# Altium PCB Cherima_DC_Multi2.PcbDoc
Units mil, origin at the board's own origin, x right, y up, seen from the top; angles counter-clockwise.
Board outline 2117 x 5995.19 mil, 2 copper layers (Top Layer, Bottom Layer); 7 components, 15 nets, 44 pads, 182 vias.
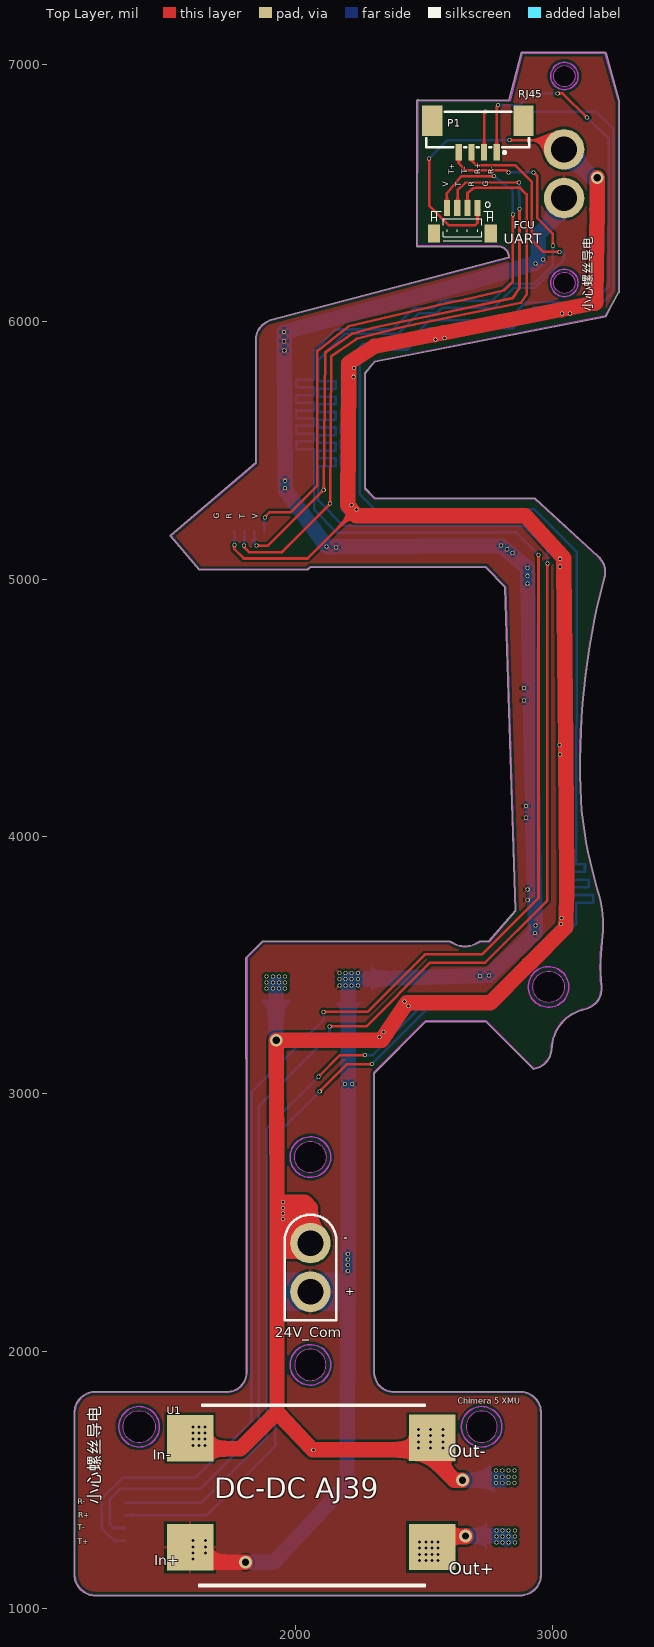
[diagram p0: Top Layer view]
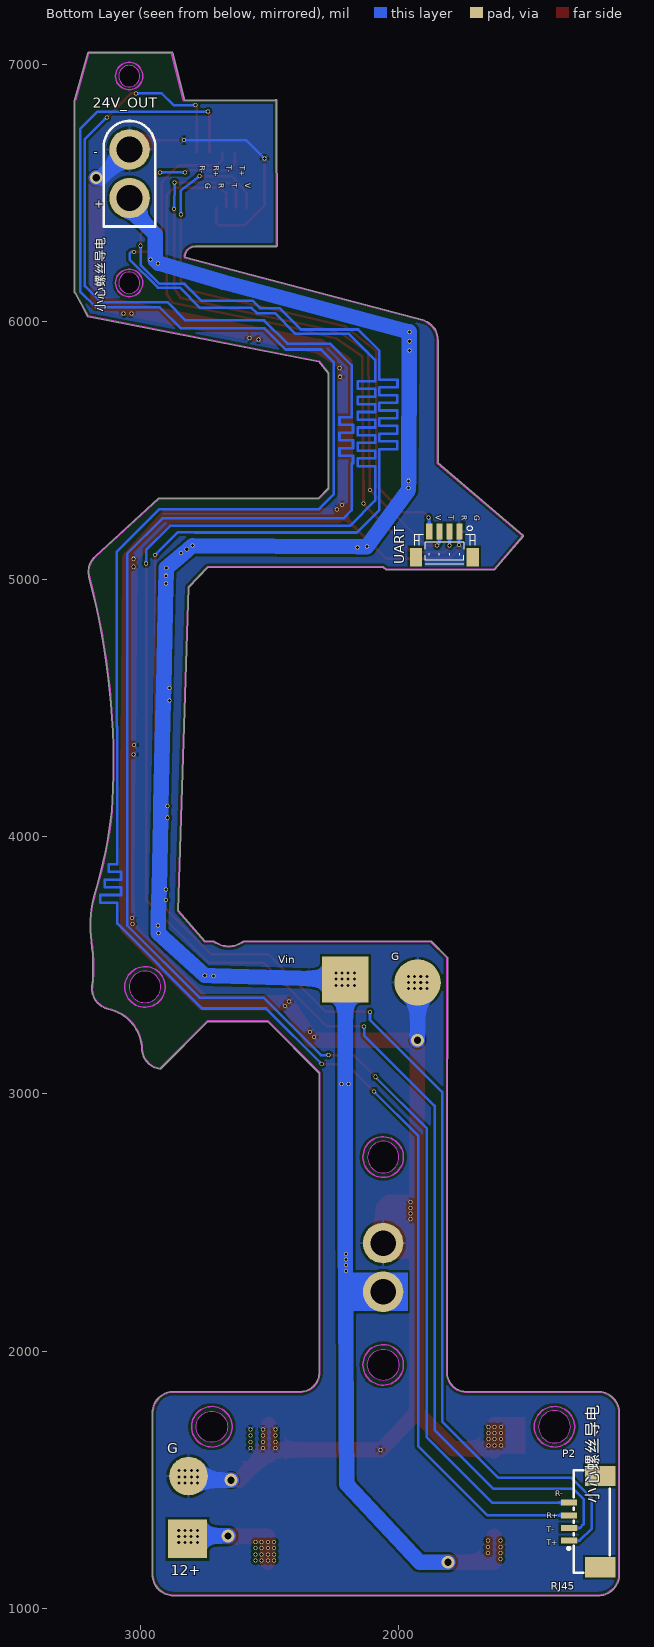
[diagram p1: Bottom Layer view, seen from below]

## Layer stack, top to bottom
Top Solder: solder mask 0.4, Solder Resist, Dk 3.5
Top Layer: signal copper 1.4
Dielectric 1: dielectric 12.6, FR-4, Dk 4.8
Bottom Layer: signal copper 1.4
Bottom Solder: solder mask 0.4, Solder Resist, Dk 3.5

## Board outline
1141.72,1132.42 ccw(c1222.97,1132.42) 1222.97,1051.17 ccw(c1222.97,1053.68) 1222.99,1051.17 2874.28,1051.17 cw(c2874.28,1053.68) 2874.26,1051.17 2874.28,1051.17 ccw(c2874.28,1132.42) 2955.53,1132.42 2955.53,1762.34 ccw(c2874.28,1762.34) 2874.28,1843.6 ccw(c2874.28,1841.08) 2874.26,1843.6 2383.68,1843.6 cw(c2383.68,1919.82) 2307.46,1919.8 ccw(c2304.94,1919.82) 2307.46,1919.82 2307.46,3080.79 2507.93,3281.27 2739.54,3281.27 2923.09,3097.71 ccw(c2924.87,3099.49) 2925.17,3097 ccw(c2915.35,3177.65) 2996.55,3174.6 cw(c3161.24,3168.39) 2996.55,3174.62 ccw(c2994.04,3174.69) 2996.55,3174.69 2996.55,3174.62 cw(c3161.24,3168.39) 3126.53,3329.5 cw(c3161.24,3168.39) 3126.55,3329.51 ccw(c3109.45,3408.94) 3190.7,3408.94 ccw(c3109.45,3408.94) 3190.24,3417.61 cw(c3904.93,3494.33) 3190.24,3417.63 cw(c3904.93,3494.33) 3193.04,3593.77 cw(c3904.93,3494.33) 3193.05,3593.79 ccw(c2761.65,3654.06) 3197.24,3654.06 ccw(c2761.65,3654.06) 3178.86,3779.26 ccw(c3176.45,3778.54) 3178.85,3779.28 cw(c4922.01,4302.35) 3113.38,4099.69 3109.06,4186.23 cw(c5925.58,4283.55) 3201.88,5007.25 ccw(c3199.46,5007.92) 3201.89,5007.27 ccw(c3123.36,5028.14) 3204.61,5028.14 ccw(c3123.36,5028.14) 3178.25,5088.05 ccw(c3176.55,5086.19) 3178.24,5088.06 3178.25,5088.05 3178.24,5088.06 2931.63,5314.04 ccw(c2929.93,5312.18) 2929.93,5314.7 2309.92,5314.7 2272.02,5352.59 2272.02,5799.43 2309.52,5844.94 3205.03,6019.66 ccw(c3204.55,6022.13) 3206.78,6020.97 3254.58,6112.41 ccw(c3256.2,6114.34) 3258.72,6114.34 3258.72,6857.41 ccw(c3256.2,6857.41) 3258.62,6858.08 3207.14,7042.59 ccw(c3204.71,7041.92) 3204.72,7044.43 ccw(c3204.71,7041.92) 3204.72,7044.43 ccw(c3202.27,7043.85) 3204.69,7044.52 ccw(c3202.27,7043.85) 3202.27,7046.36 2879.44,7046.36 ccw(c2879.44,7043.85) 2877,7044.47 2830.06,6859.95 ccw(c2832.5,6859.33) 2830.05,6859.92 2477.75,6859.92 ccw(c2475.34,6859.2) 2472.83,6859.2 2471.31,6294.26 ccw(c2473.82,6294.25) 2473.82,6291.74 2787.24,6291.74 cw(c2787.24,6250.16) 2828.82,6250.73 1906.26,6007.05 1906.24,6007.04 cw(c1906.88,6004.61) 1906.26,6007.05 1906.24,6007.04 ccw(c1926.99,5928.48) 1845.73,5928.48 ccw(c1848.25,5928.48) 1845.73,5928.46 1845.73,5451.9 1515.26,5170.27 ccw(c1516.89,5168.36) 1514.98,5166.73 1626.12,5036.31 ccw(c1628.03,5037.95) 1628.03,5035.43 2046.72,5035.43 ccw(c2046.72,5037.95) 2048.35,5036.03 2059.8,5045.8 2739.48,5045.8 2814.43,4968.3 2854.34,3711.79 2751.63,3594.13 2718.33,3594.13 ccw(c2718.33,3591.62) 2716.82,3593.63 cw(c2659.27,3670.36) 2601.73,3593.63 ccw(c2600.22,3591.62) 2600.22,3594.13 1874.17,3594.13 ccw(c1874.17,3591.62) 1872.39,3593.4 1809.07,3530.07 ccw(c1810.85,3528.29) 1808.33,3528.29 1808.33,3138.86 ccw(c1810.85,3138.86) 1810.3,3136.41 1810.3,1919.82 ccw(c1812.81,1919.82) 1810.3,1919.8 ccw(c1734.07,1919.82) 1810.3,1919.82 1810.3,1919.8 cw(c1734.07,1919.82) 1734.07,1843.6 1222.97,1843.6 cw(c1222.97,1841.08) 1222.99,1843.6 1222.97,1843.6 ccw(c1222.97,1762.34) 1141.72,1762.34 ccw(c1144.23,1762.34) 1141.72,1762.32
cut-out: 3045.57,6912.52 cw(c3045.57,6953.86) 3004.23,6953.86 cw(c3045.57,6953.86) 3045.57,6995.2 cw(c3045.57,6953.86) 3086.91,6953.86 cw(c3045.57,6953.86)
cut-out: 3045.57,6109.37 cw(c3045.57,6150.71) 3004.23,6150.71 cw(c3045.57,6150.71) 3045.57,6192.05 cw(c3045.57,6150.71) 3086.91,6150.71 cw(c3045.57,6150.71)
cut-out: 2984.07,3354.9 cw(c2984.07,3415.92) 2923.05,3415.92 cw(c2984.07,3415.92) 2984.07,3476.94 cw(c2984.07,3415.92) 3045.1,3415.92 cw(c2984.07,3415.92)
cut-out: 2058.88,2693.98 cw(c2058.88,2755) 1997.85,2755 cw(c2058.88,2755) 2058.88,2816.03 cw(c2058.88,2755) 2119.9,2755 cw(c2058.88,2755)
cut-out: 1997.85,1947.92 ccw(c2058.88,1947.92) 2058.88,1886.89 ccw(c2058.88,1947.92) 2119.9,1947.92 ccw(c2058.88,1947.92) 2058.88,2008.94 ccw(c2058.88,1947.92)
cut-out: 2663.24,1707.44 ccw(c2724.27,1707.44) 2724.27,1646.42 ccw(c2724.27,1707.44) 2785.29,1707.44 ccw(c2724.27,1707.44) 2724.27,1768.47 ccw(c2724.27,1707.44)
cut-out: 1393.49,1645.18 cw(c1393.49,1707.44) 1331.23,1707.44 cw(c1393.49,1707.44) 1393.49,1769.7 cw(c1393.49,1707.44) 1455.75,1707.44 cw(c1393.49,1707.44)

## Design rules (kind name [scope] priority, off if disabled: settings)
Clearance Clearance_2 [InNamedPolygon('VCC_L01_P000')] p1: gap=10
Clearance Clearance_1 [InNamedPolygon('GND_L02_P001')] p2: gap=10
Clearance [All] p3: gap=5
PolygonConnect PolygonConnect_1 [Isvia] p1: connectstyle=Relief reliefconductorwidth=10 reliefentries=4 polygonreliefangle="45 Angle" airgapwidth=10
PolygonConnect [All] p2: connectstyle=Relief reliefconductorwidth=10 reliefentries=4 polygonreliefangle="90 Angle" airgapwidth=10
RoutingVias [All] p1: holewidth=8 width=10 viastyle="Through Hole" minholewidth=4 minwidth=5 maxholewidth=48 maxwidth=50
SolderMaskExpansion [All] p1: expansion=4
Width [All] p1: maxlimit=100 minlimit=5 preferedwidth=10 minimp=50.000000 maximp=50.000000 favimp=50.000000
30 further rules are at their usual default settings.

## Classes and differential pairs
component class DC_Multi: 24V_Com
net class RJ45: R+ R- T+ T-

## Components (designator, comment, footprint, x,y, rotation, side; value= is the part's Value field where it differs from the comment)
24V_Com "XT30U-F" CONN-TH_XT30U-F 2059.06,2326.2 r90 top
24V_OUT "XT30U-F" CONN-TH_XT30U-F 3044.17,6574.77 r90 bottom
P1 "Comment" CONN-SMD_4P-P1.25_HCZZ0015-4 2709,6719 r180 top
P2 "Comment" CONN-SMD_4P-P1.25_HCZZ0015-4 1276.02,1338.84 r90 bottom
U1 "DC-DC AJ39" DC-DC-AJ39 2074.8,1358.27 r0 top
UART "Comment" CONN-SMD_BM04B-SRSS-TB 2649,6392 r180 top
UART "Comment" CONN-SMD_BM04B-SRSS-TB 1821,5135 r0 bottom

## Footprints (in the part's own frame and the unit in brackets; to place one, negate y for a bottom-side part, rotate by r counter-clockwise, add the part's x,y. Pads: shape width x height; smd on the part's side, far side on the other; paste and mask are expansions set on the pad)
CONN-SMD_4P-P1.25_HCZZ0015-4 [mm]
  rect 0.6x1.6 smd: 1(-1.875,1.55) 2(-0.625,1.55) 3(0.625,1.55) 4(1.875,1.55)
  rect 2x3 smd: 5(-4.5,-1.55) 6(4.5,-1.55)
  silkscreen extent -5.06,-2.45 5.09,1.7
CONN-SMD_BM04B-SRSS-TB [mm]
  rect 1.2x1.8 smd: 0(-2.8,1.263) 0(2.8,1.263)
  rect 0.6x1.55 smd: 1(-1.5,-1.263) 2(-0.5,-1.263) 3(0.5,-1.263) 4(1.5,-1.263)
  silkscreen extent -3,-1.84 3,1.96
CONN-TH_XT30U-F [mm]
  round 4 hole 2.54: 1(2.4,0) 2(-2.4,0)
  silkscreen extent -5.21,-2.54 5.2,2.54
DC-DC-AJ39 [mil]
  rect 98.42x60 smd paste+0 mask+4: 1(-446.87,356.26) 2(-446.87,256.26) 3(-446.87,-76.81) 4(-446.87,-176.81) 5(433.13,-176.81) 6(433.13,-76.81) 7(428.13,256.26) 8(428.13,356.26)
  silkscreen extent -447,-270 428,435

## Free pads (board coordinates)
  rect 150x150 smd far side: 3(2818.9,1271.65)
  round 150 smd far side: 4(2814.96,1515.75)
  round 180 smd far side: 5(1925.2,3433.07)
  rect 180x180 smd: 6(1591.79,1239.25) 6(1591.79,1663.25) 6(2531.79,1240.25) 6(2531.79,1664.25)
  rect 180x180 smd far side: 6(2205.79,3444.88)

## Via types
v1: diameter 15.75, hole 11.81, Top Layer to Bottom Layer, 177 vias
v2: diameter 50, hole 28, Top Layer to Bottom Layer, 3 vias
v3: diameter 50/50 (per signal layer), hole 28, Top Layer to Bottom Layer, 2 vias

## Nets (pads, with @x,y where several pads share a name; then routed paths per layer and width w, separated by ;. In a path a pad name is that pad's centre, name@x,y a point inside that pad or via, vN(x,y) a via of type N, cw(c..) or ccw(c..) an arc to the next point about the centre after c; other vN are vias at no path point)
5V: 
12V_OUT: pad.3 pad.6@2531.79,1240.25 U1.5 U1.6 | length 420.6
  Top Layer w60: U1.5 U1.6 2659.49,1281.46 2661.42,1279.53 v2(2661.42,1283.46)
  Bottom Layer w60: v2(2661.42,1283.46) 2807.09,1283.46 pad.3
  other v1: 2483,1188 2507,1188 2531,1188 2555,1188 2483,1212 2507,1212 2531,1212 2555,1212 2483,1236 2507,1236 2531,1236 2555,1236 2781,1257 2805,1257 2829,1257 2853,1257 2483,1260 2507,1260 2531,1260 2555,1260 2781,1281 2805,1281 2829,1281 2853,1281 2781,1305 2805,1305 2829,1305 2853,1305
GND: 24V_Com.1 24V_OUT.1 pad.4 pad.5 pad.6@1591.79,1663.25 pad.6@2531.79,1664.25 U1.1 U1.2 U1.7 U1.8 UART.1 | length 11054.8
  Top Layer w10: v1@1763,5132 1763,5117 1800,5080 2047.97,5080 2227.12,5259.15 v1(2237.95,5269.98) ; v1(2520,6633) 2520,6451 2596,6375 2699,6375 2708.02,6384.02 2708.02,6428.01 2708.05,6441.7 UART.1@2708.05,6412.06 ; v1(2832,6705) 3008.43,6705 24V_OUT.1
  Top Layer w60: U1.1 U1.2 1635.45,1622.05 1787.4,1622.05 1929.13,1763.78 ; v1(1953,2580) 2037,2580 2059.05,2557.95 24V_Com.1 ; 2335.58,3208.84 v2(1926.13,3208.84) 1929.13,2614.17 1929.13,1763.78 ; 2338.55,3213.26 2352.75,3234.47 2429.52,3349.03 2432.11,3352.9 2432.88,3354.05 2433.07,3354.33 2757.68,3354.33 2896.06,3492.71 2896.06,3493.18 2906.81,3503.93 2907.28,3503.93 3048.25,3644.89 3049.08,3645.69 3050.55,3647.23 3050.95,3660.46 3051.61,3682.47 3051.76,3687.38 3054.49,3778.33 3055.12,3830.71 3050.27,4318.22 3049.9,4355.24 3043.01,5048.14 3042.98,5051.85 3042.71,5079.14 3042.68,5082.05 3038.03,5087.18 2917.49,5220.33 2897.65,5242.25 2893.38,5246.97 2236.87,5246.97 2227.12,5259.15 2226.07,5260.46 2209.48,5281.18 2204.72,5287.12 2204.73,5288.07 2207.43,5786.09 2207.62,5820.12 2207.72,5839.46 2213.79,5843.4 2307,5904 2540.3,5949.85 2574.94,5956.65 3033.84,6046.83 3063.92,6052.74 3163.96,6072.4 3166.23,6072.85 3167,6073 3167.02,6073.98 3167.43,6097.96 3173.23,6433.54 3170.78,6435.03 ; U1.8 U1.7 ; v3(2649.61,1500) 2617.46,1500 U1.7 ; 3173.23,6437.01 v3(3173.23,6559.06) ; 1929.13,1763.78 1935.48,1757.07 2066.93,1618.11 2491.48,1618.11 2492.26,1617.86 2499.1,1615.73 U1.7
  Bottom Layer w10: UART.1@1761.94,5184.71 1764.58,5182.07 v1(1764.58,5133) ; v1(2520,6633) 2592,6705 v1(2832,6705)
  Bottom Layer w60: pad.5 1925.2,3263.78 v2(1926.13,3208.84) ; v3(2649.61,1500) pad.4@2799.21,1500 ; 24V_OUT.1 3154.37,6559.06 v3(3173.23,6559.06)
  other v1: 2780,1489 2804,1489 2828,1489 2852,1489 2780,1513 2804,1513 2828,1513 2852,1513 2780,1537 2804,1537 2828,1537 2852,1537 2070,1617 2478,1625 2526,1625 2574,1625 1602,1635 1626,1635 1650,1635 2478,1649 2526,1649 2574,1649 1602,1659 1626,1659 1650,1659 2478,1673 2526,1673 2574,1673 1602,1683 1626,1683 1650,1683 2478,1697 2526,1697 2574,1697 1602,1707 1626,1707 1650,1707 1953,2514 1953,2536 1953,2558 2327,3221 2343,3241 2440,3342 2424,3360 1889,3409 1913,3409 1937,3409 1961,3409 1889,3433 1913,3433 1937,3433 1961,3433 1889,3457 1913,3457 1937,3457 1961,3457 3033,3661 3034,3683 3028,4318 3026,4355 3029,5048 3029,5079 2218,5288 2226.95,5785.98 2229,5820 2544,5931 2579,5936 3036.95,6030.98 3068,6032
NetP1_2: 
NetP2_1: 
R+: P1.2 P2.3 | length 9084.4
  Top Layer w10: v1(2095.05,3010.5) 2200.56,3116 v1@2298,3116 ; P1.2 2733.61,6810.6 v1(2739,6816)
  Bottom Layer w10: P2.3 1654.45,1363.45 1923,1632 1923,2838 v1@2095.5,3010.5 ; v1(2297.55,3116) 2513.56,3332 2762,3332 3091.39,3661.39 3091.39,3690 3091.39,3743 3157.38,3743 3157.38,3773 3091.39,3773 3075.67,3773 3075.67,3803 3091.39,3803 3140.41,3803 3140.41,3833 3091.39,3833 3075.67,3833 3075.67,3863 3091.39,3863 3125.62,3863 3125.62,3893 3091.39,3893 3091.39,3908 3091.39,4424.85 3094,4427.46 3094,5105 2927,5272 2308,5272 2251,5329 2251,5843 2300,5892 2437.5,5892 2519.5,5974 2845,5974 2927,6056 3175,6056 3236,6117 3236,6748.23 3168.23,6816 v1(2739,6816)
R-: P1.1 P2.4 | length 9055.3
  Top Layer w10: v1(2089.55,3067) 2173.56,3151 v1@2271,3151 ; P1.1 2782.82,6836.32 v1(2787.5,6841) ; v1@3020,6887 3038.55,6887 v1(3132.55,6793)
  Bottom Layer w10: P2.4 1635.67,1412.67 1889,1666 1889,2866 v1@2090,3067 ; v1(2270.55,3151) 2301,3151 2524,3374 2773,3374 3053,3654 3053,5099 2916,5236 2213,5236 2181,5268 2181,5434 2181,5449 2176,5449 2176,5479 2181,5479 2228.47,5479 2228.47,5509 2181,5509 2176,5509 2176,5539 2181,5539 2228.47,5539 2228.47,5569 2181,5569 2176,5569 2176,5599 2181,5599 2228.47,5599 2228.47,5629 2181,5629 2181,5718 2181,5830 2265.5,5914.5 2430.5,5914.5 2521,6005 2826,6005 2897,6076 3156,6076 3218,6138 3218,6709 v1@3133,6794 ; v1(2787.5,6841) 2873,6841 2919,6887 v1(3019.55,6887)
RX: 
T+: P1.4 P2.1 | length 9055.1
  Top Layer w10: v1(2109.55,3319) 2281,3319 2504,3542 2726,3542 2945,3761 v1@2945,5093 ; P1.4 2635.16,6614.84 2662,6588 2820,6588 v1(2828,6580) ; v1(2926,6580) 2939,6567 2940,6567 2940,6402 3001,6341 v1(3001,6295)
  Bottom Layer w10: P2.1 1295.99,1265.01 1248,1313 1248,1428 1330,1510 1612,1510 1830,1728 1830,3008 2110,3288 v1@2110,3319 ; v1(2828,6580) v1(2926,6580) ; v1(2944.55,5093) 2855.35,5182.2 2791.55,5182.2 2790.35,5181 2161,5181 2074,5268 2074,5490 2074,5505 2004.8,5505 2004.8,5535 2074,5535 2074,5565 2004.42,5565 2004.42,5595 2074,5595 2074,5625 2004.04,5625 2004.04,5655 2074,5655 2074,5685 2003.65,5685 2003.65,5715 2074,5715 2074,5745 2003.27,5745 2003.27,5775 2074,5775 2074,5853 2074,5887 2156.48,5969.48 2378.48,5969.48 2461.82,6052.82 2537.7,6052.82 2565.48,6080.6 2764.14,6080.6 2830.54,6147 2927.49,6147 3001,6220.51 v1(3001,6295)
T-: P1.3 P2.2 | length 9084.4
  Top Layer w10: v1(2132.55,3263) 2277,3263 2524,3510 2738,3510 2979,3751 2979,5059 v1@2980,5060 ; P1.3 2684.39,6625.61 2702,6608 2853,6608 2919,6542 2919,6316 2964,6271 v1(3027,6271)
  Bottom Layer w10: P2.2 1294.77,1314.23 1280,1329 1280,1426 1320,1466 1630,1466 1859,1695 1859,2954 2133,3228 v1@2133,3263 ; v1(2979.55,5060) 2979.55,5113.45 2886,5207 2188,5207 2090,5305 2090,5383 2090,5439 2157.74,5439 2157.74,5469 2090,5469 2090,5499 2157.74,5499 2157.74,5529 2090,5529 2090,5559 2157.74,5559 2157.74,5589 2090,5589 2090,5619 2157.74,5619 2157.74,5649 2090,5649 2090,5679 2157.74,5679 2157.74,5709 2090,5709 2090,5739 2157.74,5739 2157.74,5769 2090,5769 2090,5784 2090,5852 2191,5953 2400,5953 2480,6033 2549,6033 2570,6054 2771,6054 2849,6132 2933.71,6132 3044,6242.29 3044,6265 3038,6271 v1(3027,6271)
TX: 
UART_5V: UART.4 | length 2369.2
  Top Layer w10: v1@1882,5242 1899,5259 1981.26,5259 2086.26,5364 2086.02,5886.02 2206.3,5981.3 2587.55,6071.99 2658,6086 2812,6123 2845,6156.75 v1(2845,6417) ; UART.4@2589.95,6441.7 2589,6444.65 2589,6499 2644,6564 v1(2772,6565)
  Bottom Layer w10: UART.4@1880.06,5184.7 1880.06,5238.06 v1@1881,5239 ; v1(2772,6565) 2845,6509.33 v1(2845,6417)
  other v1: 1882.58,5240
UART_RX: UART.2 | length 2561.3
  Top Layer w10: v1@1800,5129.92 1800,5125 1820,5105 1949,5105 2135.58,5291.58 v1(2135.58,5294) ; v1@2135.31,5294 2139.57,5866.07 2238,5933 2421.26,5980.31 2877,6074 2900,6107.54 2900,6237 2899,6365 2899,6494 2873.04,6519.96 2872.04,6520.24 2694.79,6520.24 2669,6500 UART.2@2668.68,6441.7
  Bottom Layer w10: UART.2@1801.32,5184.7 1801.58,5184.44 v1(1801.58,5130.92)
UART_TX: UART.3 | length 2486.4
  Top Layer w10: v1@1848,5129.92 1893.5,5129.92 v1(2110.58,5347) ; v1@2110.45,5347 2117.17,5880.89 2222,5954 2303,5976 2412.98,6000.31 2507.87,6019.69 2845,6092 2871,6131 v1(2871,6438) ; UART.3@2629.32,6441.7 2630.56,6445.95 2630.56,6511.91 2660.5,6539.5 v1(2869,6541)
  Bottom Layer w10: UART.3@1840.69,5184.71 1840.69,5139.82 v1(1849.58,5130.92) ; v1(2869,6541) v1(2871,6438)
VCC: 24V_Com.2 24V_OUT.2 pad.6@1591.79,1239.25 pad.6@2205.79,3444.88 U1.3 U1.4 | length 8237.1
  Top Layer w60: U1.3 U1.4 1628.29,1181.1 v2(1807.09,1181.1)
  Bottom Layer w10: 2204,2284 v1(2204,2313) v1(2204,2335) v1(2204,2357) v1(2204,2379)
  Bottom Layer w60: v2(1807.09,1181.1) 1917.32,1181.1 2142.71,1422.14 2200.79,1484.25 2201.05,1532.02 2201.85,1681 2202.18,1741.01 2205.27,2312.99 2205.38,2334.99 2205.5,2356.99 2205.62,2378.99 2205.79,2409.45 2205.79,3444.88 2218.33,3445.24 2219.02,3445.26 2219.71,3445.28 2242.31,3445.93 v1(2243,3446) 2243.69,3445.97 2717.94,3459.65 v1(2751.97,3460.63) v1(2932,3625.01) 2932,3674.17 2930.21,3754.6 2929.32,3794.58 2923.12,4073.6 2922.12,4118.56 2912.99,4529.53 2911.93,4577.51 2902.92,4982.67 2902.25,5012.99 v1(2901.57,5043.31) 2839.46,5095.86 2819.34,5112.89 v1(2799.21,5129.92) 2158.94,5126.2 v1(2122.05,5125.98) 1960.63,5346.46 v1(1960.58,5354) 1960.4,5381.99 v1(1957.22,5887.34) 1956.93,5923.98 v1(1956.69,5960.63) 2681.1,6153.54 v1@2932.99,6227.47 ; 24V_Com.2 2151.72,2231.72 2204,2284 ; 2944.34,6237.98 2944.35,6242.07 2944.74,6340.42 3059.58,6454.36 3059.62,6464.71 24V_OUT.2@3071,6476
  other v1: 1603,1193 1603,1217 1651,1217 1603,1241 1651,1241 1603,1265 1651,1265 2193,3039 2220,3039 2171,3422 2195,3422 2219,3422 2243,3422 2171,3446 2195,3446 2219,3446 2717.95,3458.98 2171,3470 2195,3470 2219,3470 2243,3470 2932.95,3654.98 2903,3754 2903,3794 2896,4073 2897,4118 2889,4529 2889,4577 2902.33,4982.66 2901.95,5012.98 2844.7,5102.05 2821.95,5115.98 2158.95,5122.98 1959.95,5381.98 1956.95,5923.98 2933.43,6225.98 2962.47,6242
pads on no net: P1.5 P1.6 P2.5 P2.6 UART.0

## Polygon pours and split planes (outlines as drawn)
VCC on Top Layer "VCC_L01_P000" (solid, remove dead copper, pour order 0): 1137.7,1132.42 cw(c1141.72,1132.42) 1137.7,1132.45 1137.7,1762.34 cw(c1222.97,1762.34) 1222.97,1847.61 cw(c1222.97,1843.6) 1223,1847.61 1734.07,1847.61 ccw(c1734.07,1919.82) 1806.28,1919.8 ccw(c1734.07,1919.82) 1806.28,1919.8 cw(c1810.3,1919.8) 1806.28,1919.82 ccw(c1810.3,1919.82) 1806.28,1919.8 1806.28,1919.82 1806.28,3134.19 cw(c1810.85,3138.86) 1804.32,3138.86 1804.32,3528.29 cw(c1808.33,3528.29) 1805.1,3530.68 cw(c1809.07,3530.07) 1806.23,3532.91 1869.55,3596.24 cw(c1872.39,3593.4) 1871.79,3597.37 cw(c1874.17,3594.13) 1874.17,3598.15 2600.22,3598.15 cw(c2600.22,3594.13) 2602.22,3597.61 cw(c2601.73,3593.63) 2604.13,3596.84 ccw(c2659.27,3670.36) 2714.41,3596.84 cw(c2716.82,3593.63) 2716.33,3597.61 cw(c2718.33,3594.13) 2718.33,3598.15 2749.8,3598.15 2850.28,3713.24 2810.46,4966.62 2737.78,5041.78 2061.28,5041.78 2050.97,5033 cw(c2048.37,5036.05) 2048.92,5032.07 cw(c2046.72,5035.43) 2046.72,5031.42 1628.03,5031.42 cw(c1628.03,5035.43) 1625.45,5032.36 cw(c1626.12,5036.31) 1623.06,5033.71 1511.92,5164.12 cw(c1516.89,5168.36) 1512.66,5173.33 1841.72,5453.76 1841.72,5928.48 cw(c1926.99,5928.48) 1905.21,6010.93 cw(c1906.24,6007.04) 1905.24,6010.93 2824.63,6253.77 ccw(c2787.24,6250.16) 2787.24,6287.72 2473.82,6287.72 cw(c2473.82,6294.25) 2467.29,6294.27 2468.81,6859.21 cw(c2475.34,6859.2) 2479.83,6863.94 2826.93,6863.94 2873.11,7045.46 cw(c2879.44,7043.85) 2879.44,7050.38 3202.27,7050.38 cw(c3202.27,7043.85) 3207.42,7047.86 3207.43,7047.86 cw(c3204.71,7041.92) 3211,7043.67 3262.49,6859.16 cw(c3258.62,6858.08) 3262.63,6858.29 cw(c3258.72,6857.41) 3262.73,6857.41 3262.73,6114.34 cw(c3258.72,6114.34) 3262.39,6112.72 cw(c3258.39,6113.11) 3261.89,6111.14 3210.24,6018.94 cw(c3206.74,6020.9) 3208.12,6017.13 cw(c3205,6019.66) 3205.77,6015.72 2311.7,5841.28 2276.04,5797.99 2276.04,5354.26 2311.58,5318.71 2929.93,5318.71 cw(c2929.93,5314.7) 2932.19,5318.01 cw(c2931.63,5314.04) 2934.34,5317 3180.96,5091.02 cw(c3178.25,5088.05) 3180.97,5091.01 cw(c3123.36,5028.14) 3208.63,5028.14 cw(c3123.36,5028.14) 3205.77,5006.24 cw(c3201.89,5007.27) 3205.76,5006.22 cw(c3201.88,5007.25) 3205.76,5006.22 cw(c3201.89,5007.27) 3205.76,5006.21 ccw(c5925.58,4283.55) 3113.07,4186.43 ccw(c5925.58,4283.55) 3113.07,4186.37 3113.07,4186.43 3117.38,4100.02 ccw(c4922.01,4302.35) 3182.69,3780.44 cw(c3178.86,3779.26) 3182.7,3780.41 cw(c2761.65,3654.06) 3201.25,3654.06 cw(c2761.65,3654.06) 3197.02,3593.24 cw(c3193.05,3593.79) 3197.02,3593.23 cw(c3193.05,3593.79) 3197.02,3593.21 ccw(c3904.93,3494.33) 3194.23,3418.06 cw(c3190.24,3417.63) 3194.23,3418.06 cw(c3190.24,3417.61) 3194.23,3418.04 cw(c3109.45,3408.94) 3194.72,3408.94 cw(c3109.45,3408.94) 3127.4,3325.58 cw(c3126.55,3329.51) 3127.39,3325.58 cw(c3126.53,3329.5) 3127.37,3325.58 ccw(c3161.24,3168.39) 3000.56,3174.54 cw(c2996.55,3174.69) 3000.56,3174.49 cw(c2996.55,3174.6) 3000.56,3174.44 cw(c2915.35,3177.65) 2925.66,3093.01 cw(c2925.17,3097) 2922.87,3093.7 cw(c2923.09,3097.71) 2920.25,3094.87 2737.87,3277.25 2509.59,3277.25 2311.47,3079.13 2311.47,1919.82 cw(c2307.46,1919.82) 2311.47,1919.8 cw(c2383.68,1919.82) 2311.47,1919.8 ccw(c2307.46,1919.8) 2311.47,1919.82 2311.47,1919.8 ccw(c2383.68,1919.82) 2383.68,1847.61 2874.28,1847.61 cw(c2874.28,1762.34) 2959.55,1762.34 2959.55,1132.42 cw(c2874.28,1132.42) 2874.28,1047.15 cw(c2874.28,1051.17) 2874.25,1047.15 1223,1047.15 cw(c1222.97,1051.17) 1222.97,1047.15 cw(c1222.97,1132.42)
GND on Bottom Layer "GND_L02_P001" (solid, remove dead copper, pour order 1): 1137.7,1132.42 cw(c1141.72,1132.42) 1137.7,1132.45 1137.7,1762.34 cw(c1222.97,1762.34) 1222.97,1847.61 cw(c1222.97,1843.6) 1223,1847.61 1734.07,1847.61 ccw(c1734.07,1919.82) 1806.28,1919.8 ccw(c1734.07,1919.82) 1806.28,1919.8 cw(c1810.3,1919.8) 1806.28,1919.82 ccw(c1810.3,1919.82) 1806.28,1919.8 1806.28,1919.82 1806.28,3134.19 cw(c1810.85,3138.86) 1804.32,3138.86 1804.32,3528.29 cw(c1808.33,3528.29) 1805.1,3530.68 cw(c1809.07,3530.07) 1806.23,3532.91 1869.55,3596.24 cw(c1872.39,3593.4) 1871.79,3597.37 cw(c1874.17,3594.13) 1874.17,3598.15 2600.22,3598.15 cw(c2600.22,3594.13) 2602.22,3597.61 cw(c2601.73,3593.63) 2604.13,3596.84 ccw(c2659.27,3670.36) 2714.41,3596.84 cw(c2716.82,3593.63) 2716.33,3597.61 cw(c2718.33,3594.13) 2718.33,3598.15 2749.8,3598.15 2850.28,3713.24 2810.46,4966.62 2737.78,5041.78 2061.28,5041.78 2050.97,5033 cw(c2048.37,5036.05) 2048.92,5032.07 cw(c2046.72,5035.43) 2046.72,5031.42 1628.03,5031.42 cw(c1628.03,5035.43) 1625.45,5032.36 cw(c1626.12,5036.31) 1623.06,5033.71 1511.92,5164.12 cw(c1516.89,5168.36) 1512.66,5173.33 1841.72,5453.76 1841.72,5928.48 cw(c1926.99,5928.48) 1905.21,6010.93 cw(c1906.24,6007.04) 1905.24,6010.93 2824.63,6253.77 ccw(c2787.24,6250.16) 2787.24,6287.72 2473.82,6287.72 cw(c2473.82,6294.25) 2467.29,6294.27 2468.81,6859.21 cw(c2475.34,6859.2) 2479.83,6863.94 2826.93,6863.94 2873.11,7045.46 cw(c2879.44,7043.85) 2879.44,7050.38 3202.27,7050.38 cw(c3202.27,7043.85) 3207.42,7047.86 3207.43,7047.86 cw(c3204.71,7041.92) 3211,7043.67 3262.49,6859.16 cw(c3258.62,6858.08) 3262.63,6858.29 cw(c3258.72,6857.41) 3262.73,6857.41 3262.73,6114.34 cw(c3258.72,6114.34) 3262.39,6112.72 cw(c3258.39,6113.11) 3261.89,6111.14 3210.24,6018.94 cw(c3206.74,6020.9) 3208.12,6017.13 cw(c3205,6019.66) 3205.77,6015.72 2311.7,5841.28 2276.04,5797.99 2276.04,5354.26 2311.58,5318.71 2929.93,5318.71 cw(c2929.93,5314.7) 2932.19,5318.01 cw(c2931.63,5314.04) 2934.34,5317 3180.96,5091.02 cw(c3178.25,5088.05) 3180.97,5091.01 cw(c3123.36,5028.14) 3208.63,5028.14 cw(c3123.36,5028.14) 3205.77,5006.24 cw(c3201.89,5007.27) 3205.76,5006.22 cw(c3201.88,5007.25) 3205.76,5006.22 cw(c3201.89,5007.27) 3205.76,5006.21 ccw(c5925.58,4283.55) 3113.07,4186.43 ccw(c5925.58,4283.55) 3113.07,4186.37 3113.07,4186.43 3117.38,4100.02 ccw(c4922.01,4302.35) 3182.69,3780.44 cw(c3178.86,3779.26) 3182.7,3780.41 cw(c2761.65,3654.06) 3201.25,3654.06 cw(c2761.65,3654.06) 3197.02,3593.24 cw(c3193.05,3593.79) 3197.02,3593.23 cw(c3193.05,3593.79) 3197.02,3593.21 ccw(c3904.93,3494.33) 3194.23,3418.06 cw(c3190.24,3417.63) 3194.23,3418.06 cw(c3190.24,3417.61) 3194.23,3418.04 cw(c3109.45,3408.94) 3194.72,3408.94 cw(c3109.45,3408.94) 3127.4,3325.58 cw(c3126.55,3329.51) 3127.39,3325.58 cw(c3126.53,3329.5) 3127.37,3325.58 ccw(c3161.24,3168.39) 3000.56,3174.54 cw(c2996.55,3174.69) 3000.56,3174.49 cw(c2996.55,3174.6) 3000.56,3174.44 cw(c2915.35,3177.65) 2925.66,3093.01 cw(c2925.17,3097) 2922.87,3093.7 cw(c2923.09,3097.71) 2920.25,3094.87 2737.87,3277.25 2509.59,3277.25 2311.47,3079.13 2311.47,1919.82 cw(c2307.46,1919.82) 2311.47,1919.8 cw(c2383.68,1919.82) 2311.47,1919.8 ccw(c2307.46,1919.8) 2311.47,1919.82 2311.47,1919.8 ccw(c2383.68,1919.82) 2383.68,1847.61 2874.28,1847.61 cw(c2874.28,1762.34) 2959.55,1762.34 2959.55,1132.42 cw(c2874.28,1132.42) 2874.28,1047.15 cw(c2874.28,1051.17) 2874.25,1047.15 1223,1047.15 cw(c1222.97,1051.17) 1222.97,1047.15 cw(c1222.97,1132.42)

## Keep-outs
Keep-Out Layer:
  circle w5: c3045.57,6150.71 r53.15
  circle w5: c3045.57,6953.86 r53.15
  circle w5: c2724.27,1707.44 r78.74
  circle w5: c1393.49,1707.44 r78.74
  circle w5: c2058.88,1947.92 r78.74
  circle w5: c2058.88,2755 r78.74
  circle w5: c2984.07,3415.92 r78.74
  lines w5: 1810.85,3138.86 1810.85,3528.29 1874.17,3591.62 2600.22,3591.62 ccw(c2659.27,3670.36) 2718.33,3591.62 2752.77,3591.62 2856.89,3710.88 2816.91,4969.35 2740.55,5048.31 2058.88,5048.31 2046.71,5037.95 1628.03,5037.95 1516.89,5168.36 1848.25,5450.74 1848.25,5928.48 cw(c1926.99,5928.48) 1906.88,6004.61 2832.5,6249.1 ; 1812.81,3530.26 1812.81,1919.82 cw(c1734.07,1919.82) 1734.07,1841.08 1222.97,1841.08 ccw(c1222.97,1762.34) 1144.23,1762.34 1144.23,1132.42 ccw(c1222.97,1132.42) 1222.97,1053.68 2874.28,1053.68 ccw(c2874.28,1132.42) 2953.02,1132.42 2953.02,1762.34 ccw(c2874.28,1762.34) 2874.28,1841.08 2383.68,1841.08 cw(c2383.68,1919.82) 2304.94,1919.82 2304.94,3081.83 2506.89,3283.78 2740.58,3283.78 2924.87,3099.49 ccw(c2915.35,3177.65) 2994.04,3174.69 cw(c3161.24,3168.39) 3126.02,3331.96 ccw(c3109.45,3408.94) 3187.74,3417.34 cw(c3904.93,3494.33) 3190.56,3594.14 ccw(c2761.65,3654.06) 3176.45,3778.54 cw(c4922.01,4302.35) 3110.87,4099.49 3106.54,4186.11 cw(c5925.58,4283.55) 3199.46,5007.92 ccw(c3123.36,5028.14) 3176.55,5086.19 2929.93,5312.18 2308.88,5312.18 2269.51,5351.55 2269.51,5800.33 2308.15,5847.24 3204.55,6022.13 3256.2,6114.34 3256.2,6857.41 3204.71,7041.92 2881.88,7041.92 2834.94,6857.41 2475.34,6857.41 ; 2475.34,6859.2 2473.82,6294.25 2527.69,6294.25 2787.24,6294.25 cw(c2787.24,6250.16) 2831.34,6250.16 ; 2832.5,6859.33 2879.44,7043.85 3202.27,7043.85 3253.76,6859.33

## Other copper
Top Layer:
  rectangle net GND: 1903,2359 2087,2551
  rectangle net GND: 1506,1602 1641,1746
Bottom Layer:
  rectangle net VCC: 1963,2157 2234,2307

## Silkscreen, mask and mechanical layers (free items; w line width, h text height)
Top Overlay:
  text "RJ45" at 2867,6869 h30
  text "T-" at 2669,6574 h20.63 r90
  text "T+" at 2617,6573 h20.63 r90
  text "R+" at 2718,6572 h20.63 r90
  text "R-" at 2772,6572 h20.63 r90
  text "V" at 2594,6525 h20.63 r90
  text "T" at 2645.53,6525 h20.63 r90
  text "R" at 2696,6525 h20.63 r90
  text "G" at 2749,6525 h20.63 r90
  text "FCU" at 2848,6360 h30
  text "小心螺丝导电" at 3166,6039 h60 r90
  text "G" at 1704.26,5234.21 h20.63 r90
  text "R" at 1753.08,5234.21 h20.63 r90
  text "T" at 1806.05,5234.21 h20.63 r90
  text "V" at 1854.86,5234.21 h20.63 r90
  text "-" at 2189,2427.78 h32.44
  text "+" at 2195,2218.59 h32.44
  text "Chimera 5 XMU" at 2631,1789 h40
  text "Out-" at 2597,1588 h48.19
  text "R-" at 1156,1406 h20.63
  text "小心螺丝导电" at 1259,1405 h80 r90
  text "R+" at 1157,1354 h20.63
  text "T-" at 1155,1305 h20.63
  text "T+" at 1155,1251 h20.63
  text "Out+" at 2596,1132 h48.19
Bottom Overlay:
  text "-" at 3183,6643.78 h32.44
  text "T-" at 2669,6607 h20.63 r90
  text "T+" at 2617,6606 h20.63 r90
  text "R+" at 2718,6605 h20.63 r90
  text "R-" at 2772,6605 h20.63 r90
  text "V" at 2595,6538 h20.63 r90
  text "T" at 2646.53,6538 h20.63 r90
  text "R" at 2697,6538 h20.63 r90
  text "G" at 2750,6538 h20.63 r90
  text "+" at 3181,6441.59 h32.44
  text "小心螺丝导电" at 3129,6037 h60 r270
  text "G" at 1704.26,5248.21 h20.63 r90
  text "R" at 1753.08,5248.21 h20.63 r90
  text "T" at 1806.05,5248.21 h20.63 r90
  text "V" at 1854.86,5248.21 h20.63 r90
  text "G" at 2028,3520 h30
  text "Vin" at 2467,3508 h30
  text "R-" at 1391,1437 h20.63
  text "小心螺丝导电" at 1208,1408 h80 r270
  text "R+" at 1423,1352 h20.63
  text "T-" at 1423,1298 h20.63
  text "T+" at 1423,1248 h20.63
  text "RJ45" at 1408,1075 h30

## Text inside footprints (layer, text, board x,y; h text height)
U1: Top Overlay "In-" at 1446,1579 h39.37; Top Overlay "In+" at 1453,1169 h39.37; Bottom Overlay "12+" at 2885,1131 h39.37; Bottom Overlay "G" at 2897,1604 h39.37